# EAGLE board Stoplight_Feather_PCB_v300 (EAGLE 9.7.0)
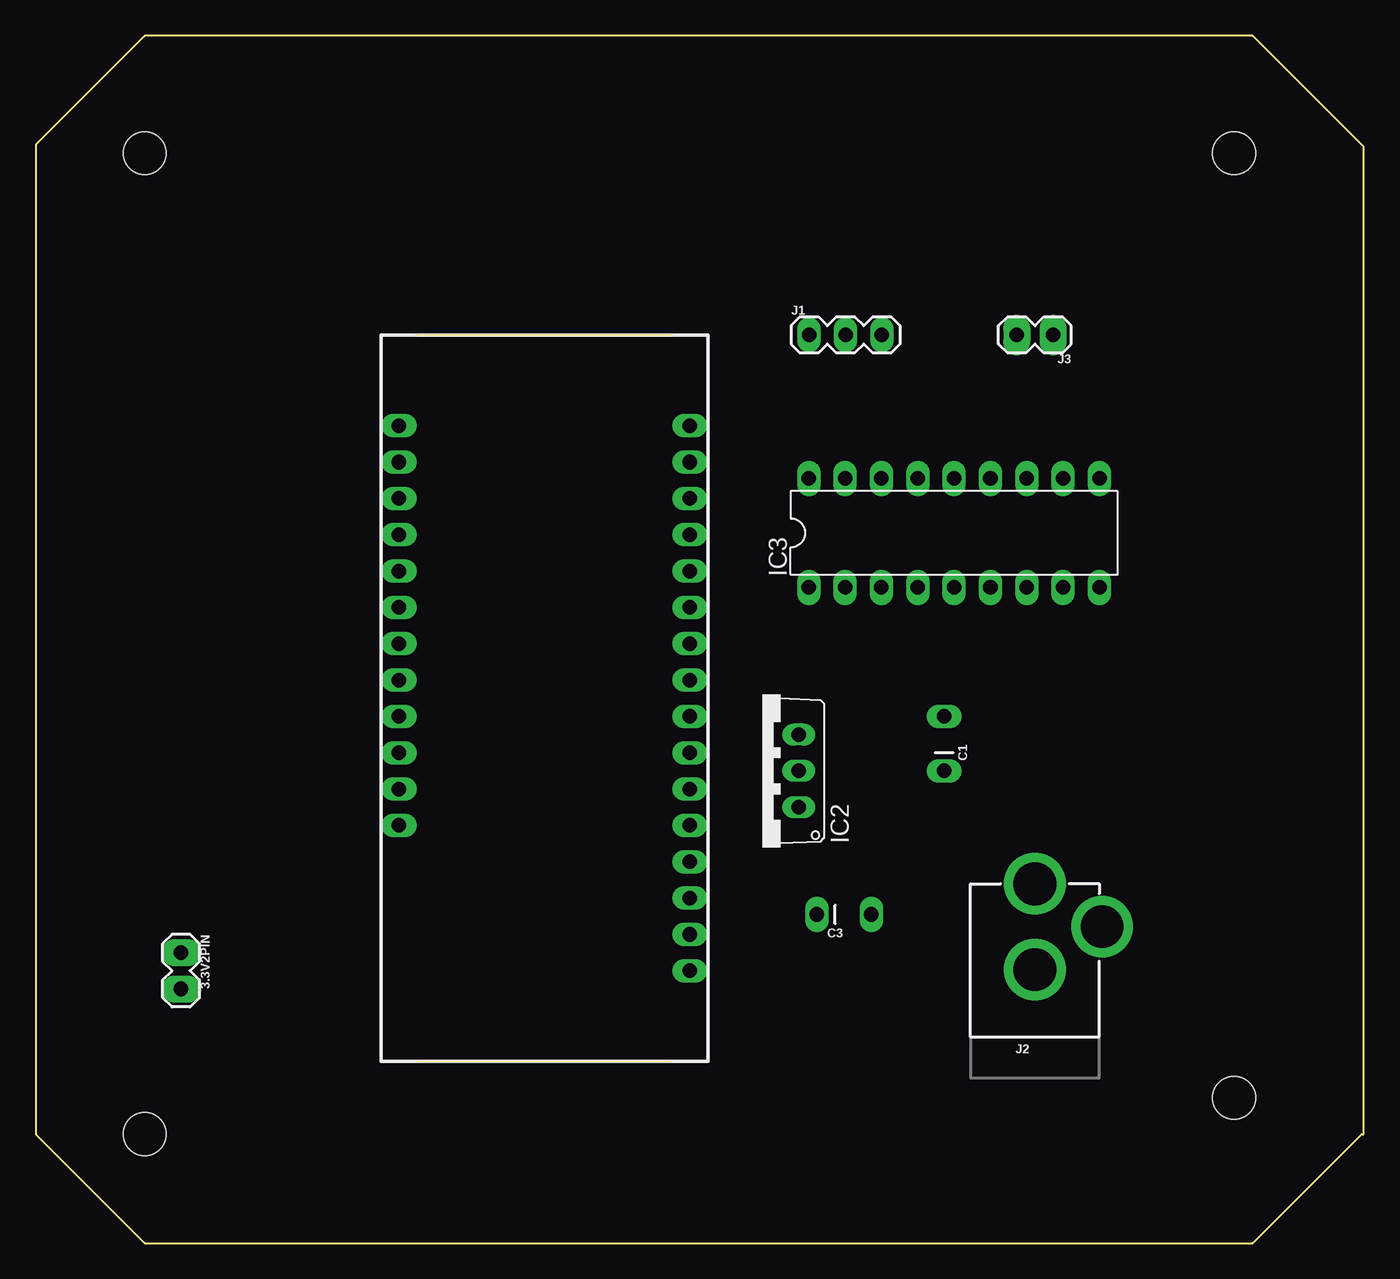
[diagram p0: board, top side]
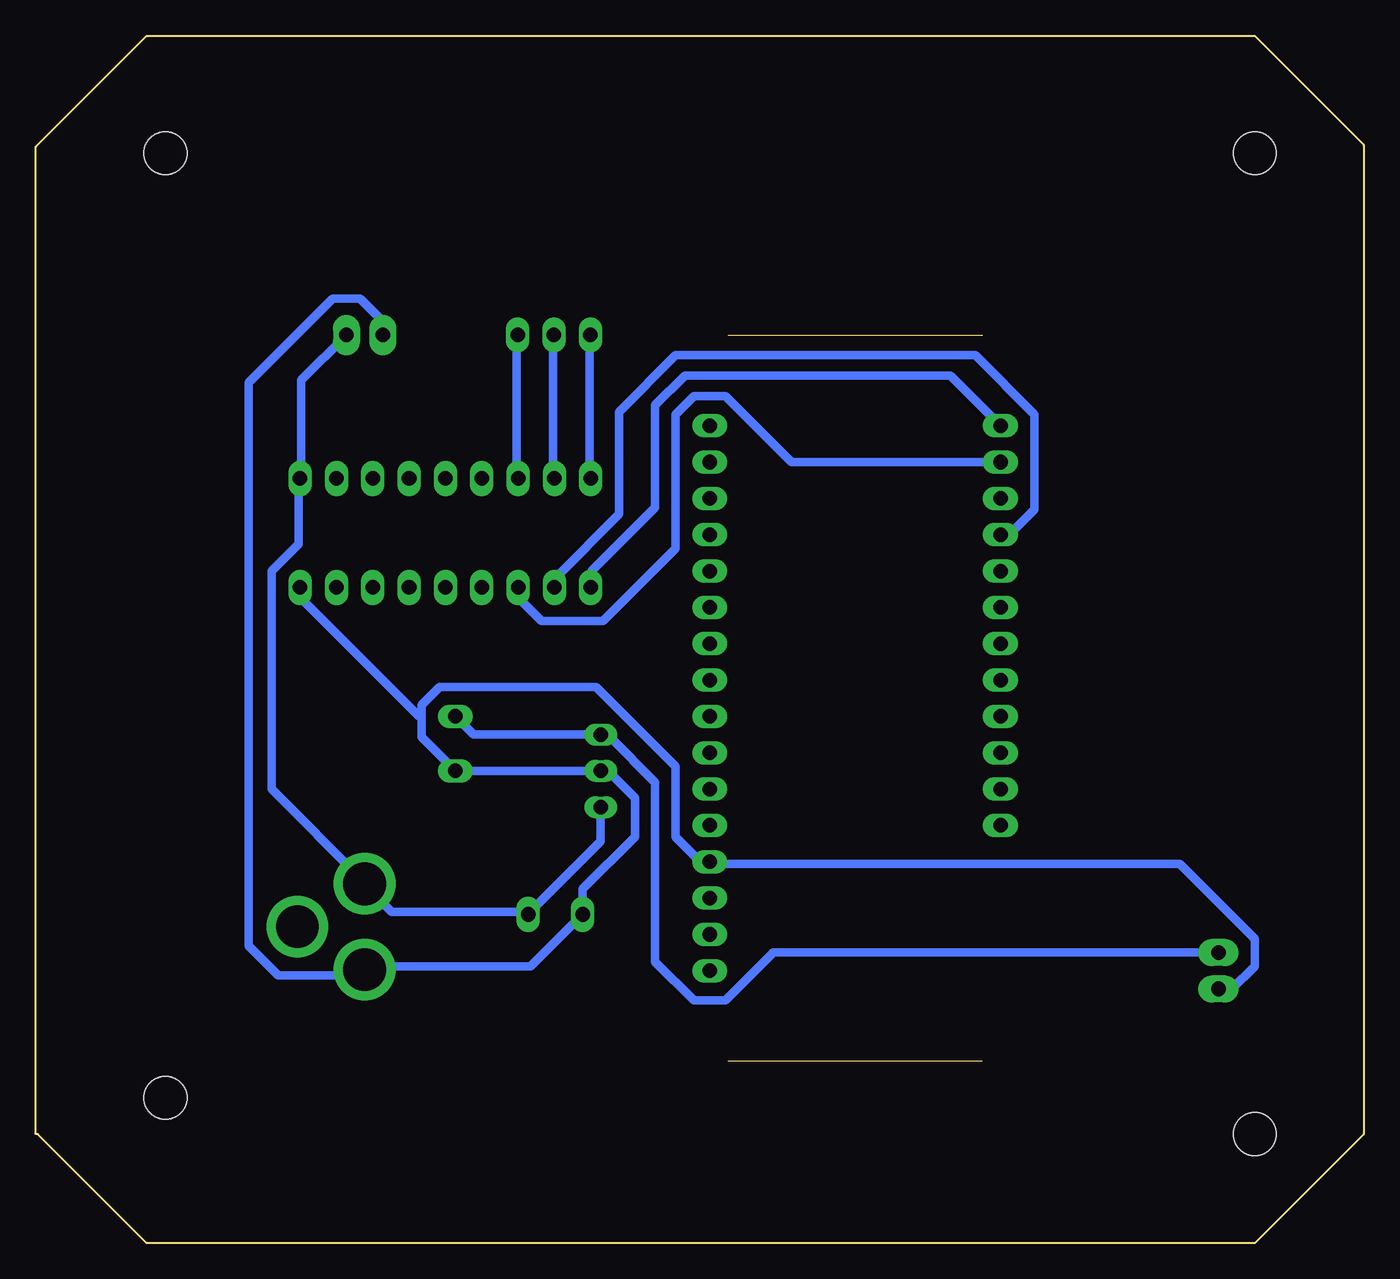
[diagram p1: board, bottom side, seen from below]

Size 92.84 x 84.41 mm. Coordinates in mm from the lower left corner, seen from the top.
Outline: 0,76.79 0,7.62 7.62,0 85.07,0 92.69,7.62 92.84,7.62 92.84,76.64 85.07,84.41 7.62,84.41 0,76.79
Copper layers (1*16): Top / Bottom
Stack-up Default Layer Stack: Top User Defined 0.035mm / Dielectric-1 User Defined 1.5mm / Bottom User Defined 0.035mm
Design rules "OthermillDRC_1_32_v2": minimum track width 8mil, minimum drill 0.8mm, track to track 0.794003125mm, track to pad 0.794003125mm, pad to pad 0.794003125mm, via to via 0.794003125mm, smd to smd 0mil, copper to edge 0mil, drill to drill 1mil, minimum pad ring 10mil, minimum via ring 10mil, stop-mask expansion 1mil, vias tented up to drill 30mil, thermal gap 10mil
Net classes: 0 default: width 0.61 mm, drill 0.61 mm, clearance 0.61 mm
Holes 3 mm at 7.62,76.2 7.62,7.62 83.77,10.16 83.77,76.2

## Footprints (pad centres in the part's own frame; a part is rotated, then mirrored left to right if it is on the bottom)
1X02 = drill 1.016 pad 1.88 long: 1 0,0; 2 2.54,0
CAP-PTH-2.54 = drill 1.016 pad 1.651 long: 1 -2.54,0; 2 1.27,0
TO220V = drill 1.016 long: 1 -2.54,-2.54; 2 0,-2.54; 3 2.54,-2.54
DIL18 = drill 1.016 pad 1.651 long: 1 -10.16,-3.81; 2 -7.62,-3.81; 3 -5.08,-3.81; 4 -2.54,-3.81; 5 0,-3.81; 6 2.54,-3.81; 7 5.08,-3.81; 8 7.62,-3.81; 9 10.16,-3.81; 10 10.16,3.81; 11 7.62,3.81; 12 5.08,3.81; 13 2.54,3.81; 14 0,3.81; 15 -2.54,3.81; 16 -5.08,3.81; 17 -7.62,3.81; 18 -10.16,3.81
1X03 = drill 1.016 pad 1.651 long: 1 0,0; 2 2.54,0; 3 5.08,0
POWER_JACK_PTH = drill 2.997 pad 4.318: GND 0,7.7; GNDBREAK 4.7,10.7; PWR 0,13.7
FEATHERWING = drill 1.016 pad 1.651 long: 1 6.35,1.27; 2 8.89,1.27; 3 11.43,1.27; 4 13.97,1.27; 5 16.51,1.27; 6 19.05,1.27; 7 21.59,1.27; 8 24.13,1.27; 9 26.67,1.27; 10 29.21,1.27; 11 31.75,1.27; 12 34.29,1.27; 13 36.83,1.27; 14 39.37,1.27; 15 41.91,1.27; 16 44.45,1.27; 17 44.45,21.59; 18 41.91,21.59; 19 39.37,21.59; 20 36.83,21.59; 21 34.29,21.59; 22 31.75,21.59; 23 29.21,21.59; 24 26.67,21.59; 25 24.13,21.59; 26 21.59,21.59; 27 19.05,21.59; 28 16.51,21.59

## Placement (x,y rotation side)
3.3V2PIN  [1X02]  10.16,20.32 270 top
C1  22pF  [CAP-PTH-2.54]  63.5,34.29 270 top
C3  22pF  [CAP-PTH-2.54]  55.88,22.99 180 top
IC2  7805TV  [TO220V]  50.8,33.02 90 top
IC3  [DIL18]  64.2,49.66 0 top
J1  [1X03]  54.07,63.5 0 top
J2  POWER_JACK  [POWER_JACK_PTH]  69.85,11.43 0 top
J3  [1X02]  71.12,63.5 180 top
MS1  FEATHERWING  [FEATHERWING]  46.99,12.7 90 top

## Library data of the parts
3.3V2PIN J3 = 2 Pin Connector Long Pads
C1 C3 = Capacitor Long Pads; PROD_ID: CAP-09128
IC2 = linear
IC3 = ULN2803 Long Pads
J1 = 3 pin header Long pad
J2 = SparkFun-Connectors; PROD_ID: CONN-08197
MS1 = Feather Huzzah Long Pads

## Nets
3.3V: 3.3V2PIN.1 C1.1 IC2.3
5V: C3.1 IC2.1 IC3.10 J2.PWR J3.1
GND: 3.3V2PIN.2 C1.2 C3.2 IC2.2 IC3.9 J2.GND J3.2 MS1.4
GREEN: IC3.1 MS1.17
N$1: J2.GNDBREAK
N$2: IC3.18 J1.1
N$3: IC3.17 J1.2
N$4: IC3.16 J1.3
RED: IC3.3 MS1.18
YELLOW: IC3.2 MS1.20

## Tracks (layer width: path | path; a pad name or v marks a point on that pad's centre or on a via)
3.3V
  Bottom 0.61: C1.1 62.23,35.56 IC2.3 53.18,35.4 52.7,35.4 49.53,32.23 49.53,19.68 46.83,16.99 44.61,16.99 41.28,20.32 3.3V2PIN.1
5V
  Bottom 0.61: J3.1 74.3,60.33 74.3,53.5 IC3.10 74.45,53.18 74.45,48.89 76.36,46.99 76.36,31.75 70.01,25.4 J2.PWR 69.85,25.08 67.95,23.18 58.58,23.18 C3.1 58.42,23.02 53.34,28.1 IC2.1
GND
  Bottom 0.61: J3.2 68.58,64.45 70.17,66.04 72.07,66.04 77.95,60.17 77.95,20.8 75.88,18.73 70.17,18.73 69.85,19.05 J2.GND 69.69,19.37 58.26,19.37 54.77,22.86 C3.2 54.61,24.77 50.96,28.42 50.96,31.11 52.7,32.86 53.18,32.86 IC2.2 C1.2 65.88,35.4 65.88,36.83 | 65.88,36.83 65.88,37.62 64.61,38.89 53.66,38.89 48.1,33.34 48.1,28.42 46.36,26.67 MS1.4 45.56,26.51 12.86,26.51 7.62,21.27 7.62,19.37 9.21,17.78 3.3V2PIN.2 | IC3.9 74.3,45.72 74.3,45.08 66.04,36.83 65.88,36.83
GREEN
  Bottom 0.61: MS1.17 28.89,60.64 47.47,60.64 49.53,58.58 49.53,51.44 53.98,46.99 53.98,45.88 IC3.1
N$2
  Bottom 0.61: IC3.18 54.13,53.5 54.13,63.5 J1.1
N$3
  Bottom 0.61: IC3.17 56.67,53.5 56.67,63.5 J1.2
N$4
  Bottom 0.61: IC3.16 59.21,53.5 59.21,63.5 J1.3
RED
  Bottom 0.61: MS1.18 40,54.61 44.61,59.21 46.83,59.21 48.1,57.94 48.1,48.58 53.18,43.5 57.47,43.5 59.06,45.08 59.06,45.72 IC3.3
YELLOW
  Bottom 0.61: MS1.20 24.76,49.53 23.02,51.28 23.02,57.94 27.15,62.07 48.1,62.07 52.07,58.1 52.07,50.96 56.52,46.51 56.52,45.88 IC3.2